# Altium PCB smartBattery.PcbDoc
Units mil, origin at the board's own origin, x right, y up, seen from the top; angles counter-clockwise.
Board outline 3495 x 2505 mil, 2 copper layers (Top Layer, Bottom Layer); 18 components, 17 nets, 60 pads, 2 vias.
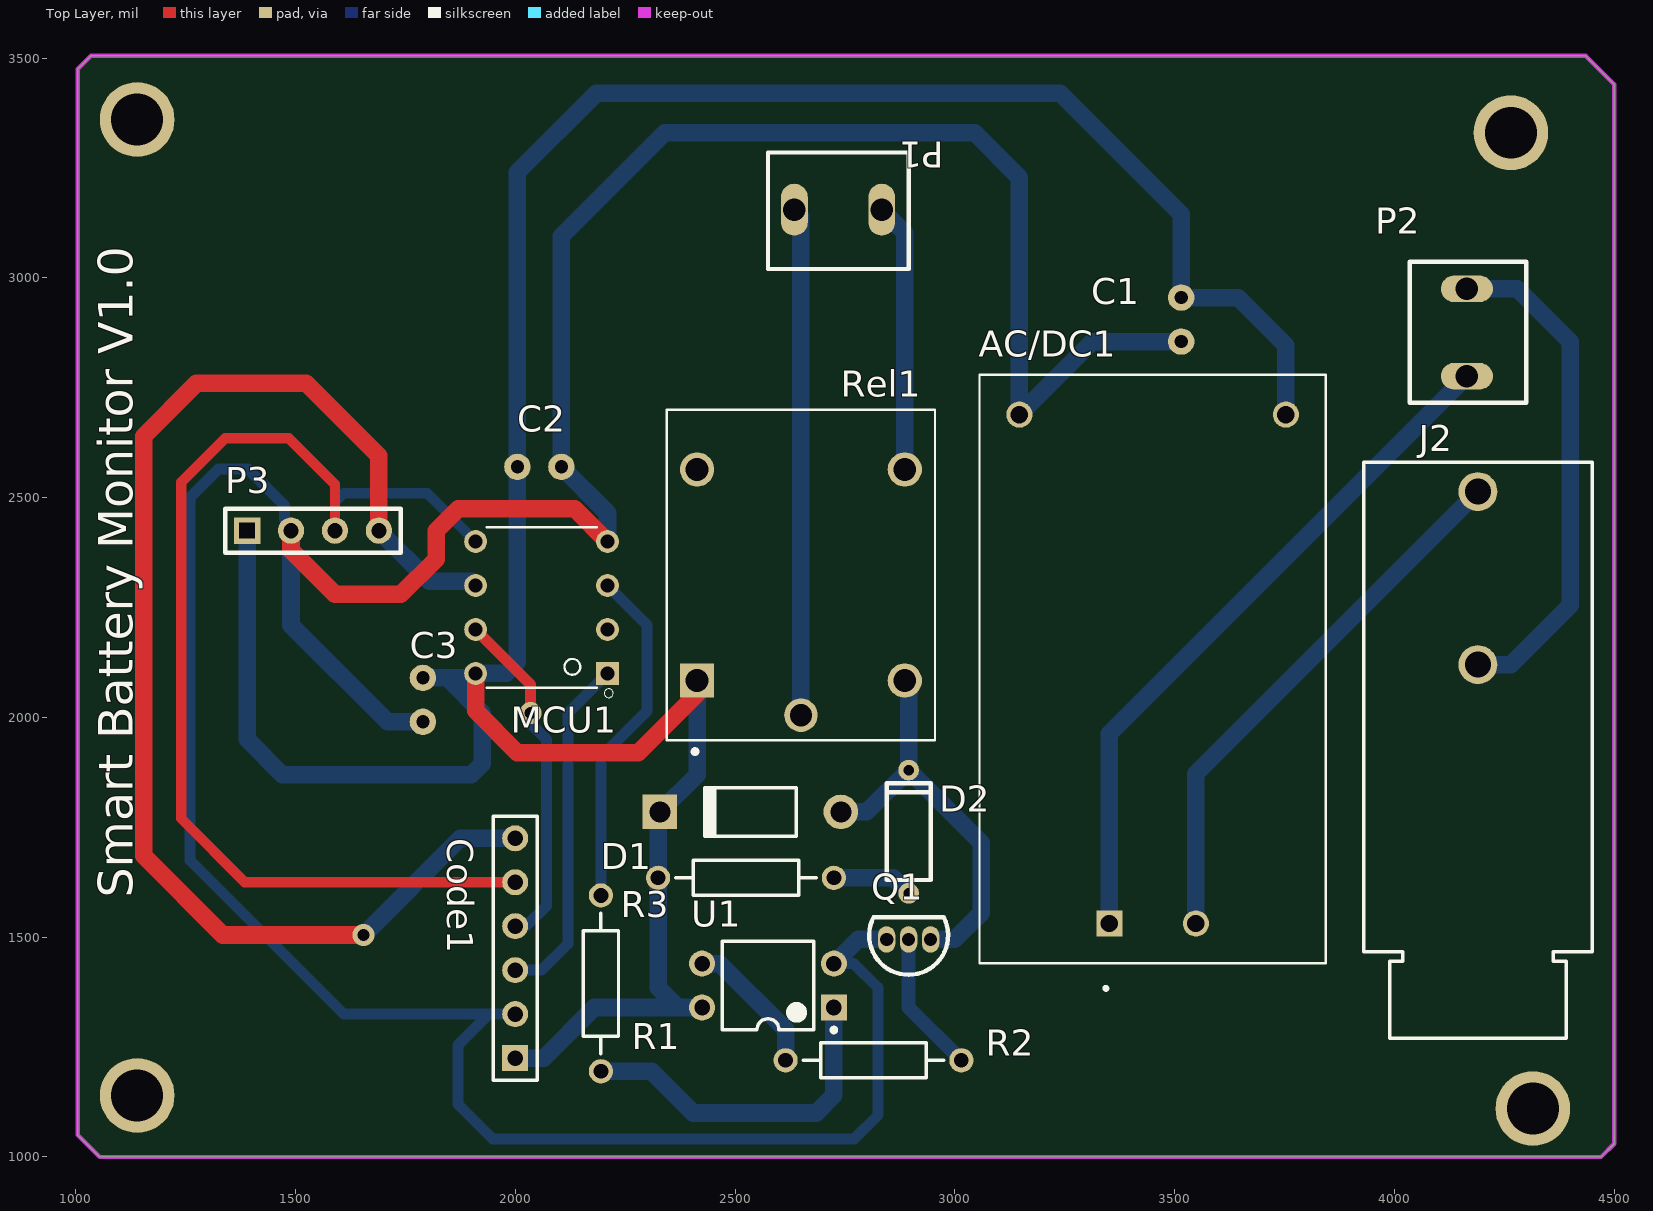
[diagram p0: Top Layer view]
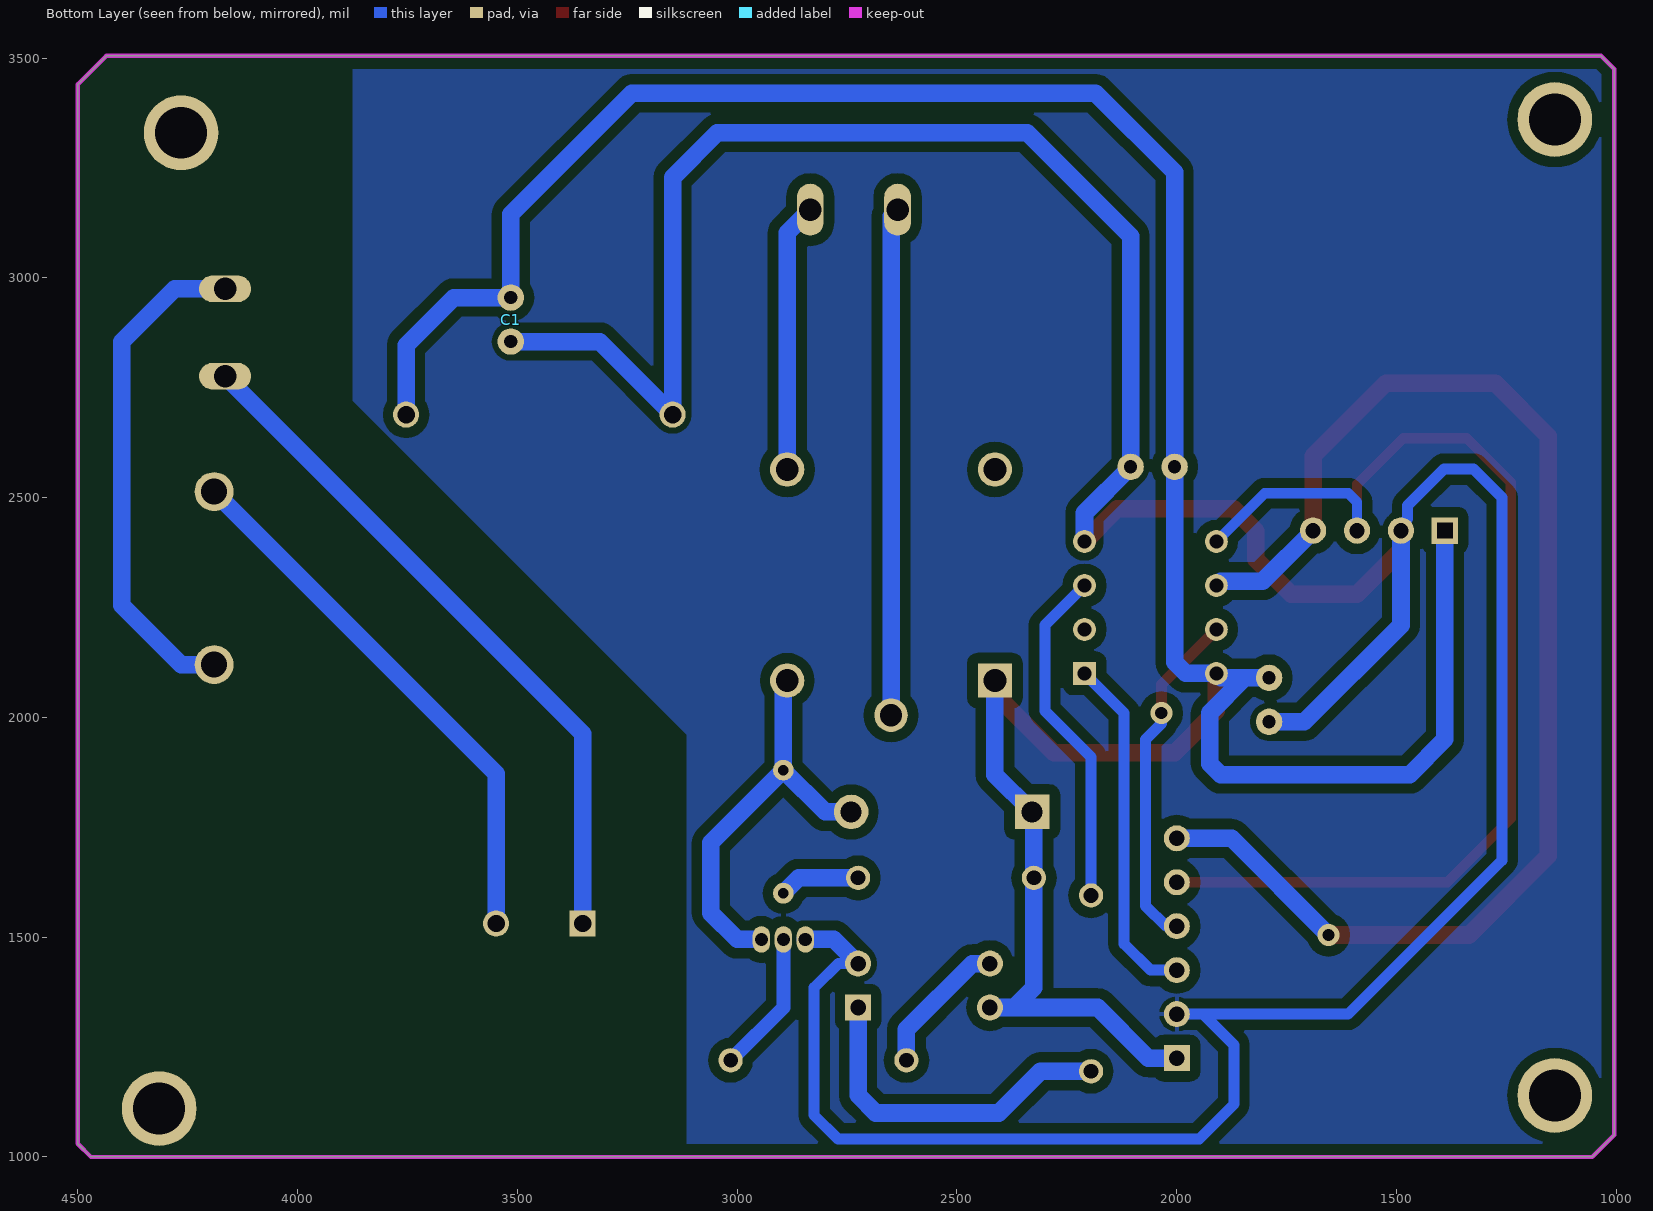
[diagram p1: Bottom Layer view, seen from below]

## Layer stack, top to bottom
Top Solder: solder mask 0.4, Solder Resist, Dk 3.5
Top Layer: signal copper 1.4
Dielectric 1: dielectric 12.6, FR-4, Dk 4.8
Bottom Layer: signal copper 1.4
Bottom Solder: solder mask 0.4, Solder Resist, Dk 3.5

## Board outline
1005,1050 1005,3475 1035,3505 4435,3505 4500,3440 4500,1030 4470,1000 1055,1000

## Design rules (kind name [scope] priority, off if disabled: settings)
Clearance [All] p1: gap=23.62 ignorepadtopadclearanceinfootprint=FALSE
PolygonConnect [All] p1: connectstyle=Relief reliefconductorwidth=10 reliefentries=4 polygonreliefangle="90 Angle" airgapwidth=10
RoutingVias [All] p1: holewidth=28 width=50 viastyle="Through Hole" minholewidth=28 minwidth=50 maxholewidth=28 maxwidth=50
SolderMaskExpansion [All] p1: expansion=4
Width [All] p1: maxlimit=50 minlimit=23.62 preferedwidth=31.5
30 further rules are at their usual default settings.

## Components (designator, comment, footprint, x,y, rotation, side; value= is the part's Value field where it differs from the comment)
AC/DC1 "HLK-PM03" CONV_HLK-PM03 3450,2110 r90 top
C1 "10 uF" AluminumCap 3515,2905 r270 bottom (schematic designator c1)
C2 "0.1uF" ceramicCapTHT 2055,2570 r180 top
C3 "0.1uF" ceramicCapTHT 1790,2040 r90 top
Code1 "" HDR1X6 2000,1225 r90 top
D1 "Diode 1N4001" DO-41 2535,1785 r180 top
D2 "LED" SDO27 2895,1600 r90 top
J2 "Fuse" 696310001002 4190,2316.85 r90 top
MCU1 "ATTINY85-20PU" DIP762W46P254L927H533Q8B 2060,2250 r180 top
P1 "Charger_Socket" TB_2Pin 2635,3155 r0 top
P2 "AC_In" TB_2Pin 4165,2776.18 r90 top
P3 "Bluetooth" pinhead_01x04 1390,2425 r0 top
Q1 "BC337-25RL1G" TO-92 2945,1495 r180 top
R1 "Res2" AXIAL-0.4 2195,1395 r270 top value=470
R2 "Res2" AXIAL-0.4 2815,1220 r180 top value=470
R3 "Res2" AXIAL-0.4 2525,1635 r180 top value=220
Rel1 "Relay 5VDC" RELAY_SRD-05VDC-SL-C 2650,2323.9 r90 top
U1 "PC817" DIP-4 2575,1390 r180 top

## Footprints (in the part's own frame and the unit in brackets; to place one, negate y for a bottom-side part, rotate by r counter-clockwise, add the part's x,y. Pads: shape width x height; smd on the part's side, far side on the other; paste and mask are expansions set on the pad)
696310001002 [mm]
  round 2.25 hole 1.5: 1(-5,0) 2(5,0)
  silkscreen extent -26.6,-6.6 6.7,6.6
AluminumCap [mil]
  round 60 hole 30: 1(-50,0) 2(50,0)
  body extent -108,-108 108,108, height 512
AXIAL-0.4 [mm] "Axial Device, Thru-Hole; 2 Leads; 0.4 in Pin Spacing"
  round 1.4 hole 0.85: 1(-5.08,0) 2(5.08,0)
  silkscreen extent -4.06,-1.02 4.06,1.02
ceramicCapTHT [mil]
  round 60 hole 30: 1(-50,0) 2(50,0)
  body extent -79,-49 79,49, height 217
CONV_HLK-PM03 [mm]
  rect 1.508x1.508 hole 1: 1(-14.7,2.5)
  round 1.508 hole 1: 2(-14.7,-2.5) 3(14.7,7.7) 4(14.7,-7.7)
  silkscreen extent -18.55,-10 17,10
DIP762W46P254L927H533Q8B [mil]
  rect 52x52 hole 32: 1(-150,150)
  round 52 hole 32: 2(-150,50) 3(-150,-50) 4(-150,-150) 5(150,-150) 6(150,-50) 7(150,50) 8(150,150)
  silkscreen extent -163,-182 125,205, body extent -155,-183 155,183, height 98
DIP-4 [mm] "DIP; 4 Leads; Row Spacing 7.62 mm; Pitch 2.54 mm"
  rect 1.5x1.5 hole 0.9: 1(-3.81,1.27)
  round 1.5 hole 0.9: 2(-3.81,-1.27) 3(3.81,-1.27) 4(3.81,1.27)
  silkscreen extent -3.94,-2.55 2.65,2.69, body extent -3.15,-2.5 3.15,2.5, height 5.6
DO-41 [mm] "Diode, Axial; Body 5.2 x 2.7 mm (LxDia. max), Lead Dia. 0.86 mm (max)"
  round 2 hole 1.2: 1(-5.23,0)
  rect 2x2 hole 1.2: 2(5.23,0)
  silkscreen extent -2.65,-1.4 2.75,1.4
HDR1X6 [mm] "Connector; Header; 6 Position"
  rect 1.5x1.5 hole 0.9: 1(0,0)
  round 1.5 hole 0.9: 2(2.54,0) 3(5.08,0) 4(7.62,0) 5(10.16,0) 6(12.7,0)
  silkscreen extent -1.27,-1.27 13.97,1.27
pinhead_01x04 [mil]
  rect 60x60 hole 35 square: 1(0,0)
  round 60 hole 35: 2(100,0) 3(200,0) 4(300,0)
  silkscreen extent -50,-50 350,50, body extent -60,-50 360,50, height 335
RELAY_SRD-05VDC-SL-C [mm]
  rect 1.98x1.98 hole 1.32: A1(-6.1,6)
  round 1.98 hole 1.32: A2(-6.1,-6) NC(6.1,6) NO(6.1,-6)
  round 1.935 hole 1.29: COM(-8.1,0)
  silkscreen extent -10.3,-7.75 9.55,7.75
SDO27 [mm]
  round 1.2 hole 0.6: 1(0,0) 2(7.112,0)
  silkscreen extent 0.76,-1.27 6.35,1.27, body extent -0.19,-1.02 7.31,0.98, height 2
TB_2Pin [mm]
  oval 1.55x3 hole 1.3: 1(0,0) 2(5.05,0)
  silkscreen extent -1.52,-3.43 6.6,3.3, body extent -2.54,-4.95 7.46,5.55, height 14
TO-92 [mil] "TO-92"
  oval 39.37x60 hole 30: 1(0,0) 2(50,0) 3(100,0)
  silkscreen extent -40,-50 140,81, body extent -44,-60 144,94, height 217

## Part data
AC/DC1: "AC DC 3W power module", Package=Package, Availability=Unavailable, MF=Hi-link, MP=HLK-PM03, Price=None, SnapEDA_Link=https://www.snapeda.com/parts/HLK-PM03/Hi-link/view-part/3215695/?ref=snap
C1: library part AluminumCap, "Cap Aluminum 10uF 400V 20% (10 X 16mm) Radial 5mm 150mA 8000 hr 105C Bulk", Case Size/Dimension="10 x 16 mm", Manufacturer 1=Nichicon, Manufacturer Part Number 1=UCY2G100MPD, Operating Temp-Max="105 C", Rated Voltage="400 V", Supplier Part Number 1=493-13387-ND, Capacitance="10 uF", ComponentLink1Description=http://www.nichicon.co.jp/english/products/pdfs/e-cy.pdf?src-supplier=Avnet, ComponentLink1URL=http://www.nichicon.co.jp/english/products/pdfs/e-cy.pdf?src-supplier=Avnet, ComponentLink2Description=https://www.verical.com/server-webapp/html/getDatasheet?partID=464569&src-supplier=Verical, ComponentLink2URL=https://www.verical.com/server-webapp/html/getDatasheet?partID=464569&src-supplier=Verical, ComponentLink3Description=http://www.farnell.com/datasheets/51405.pdf?src-supplier=Element14, ComponentLink3URL=http://www.farnell.com/datasheets/51405.pdf?src-supplier=Element14, ComponentLink4Description=http://www.farnell.com/datasheets/1914577.pdf?src-supplier=Element14, ComponentLink4URL=http://www.farnell.com/datasheets/1914577.pdf?src-supplier=Element14, ComponentLink5Description=http://www.nichicon.co.jp/english/products/pdfs/e-cy.pdf?src-supplier=Avnet+Europe, ComponentLink5URL=http://www.nichicon.co.jp/english/products/pdfs/e-cy.pdf?src-supplier=Avnet+Europe, Description 1="Cap Aluminum 10uF 400V 20% (10 X 16mm) Radial 5mm 150mA 8000 hr 105C Bulk", Pricing 1="1=0.82, 10=0.622, 50=0.5164, 100=0.4447, 500=0.3443, 1000=0.2965, 2500=0.2773, 5000=0.263 (USD)", Stock 1=39516, Supplier 1=Digi-Key, Type=Radial
C2 C3: library part ceramicCapTHT, "22pF 50 V dc Ceramic Single Layer Capacitor; Y5R Dielectric THT F Series", Capacitance Tolerance="± 10%", Capacitor Terminals="Radial Leaded", Dielectric Characteristic=Y5R, Manufacturer 1=Vishay, Manufacturer Part Number 1=F222K69Y5RP63K7R, Operating Temperature Max=125°C, Operating Temperature Min=-30°C, Supplier Part Number 1=1241PH-ND, Voltage Rating=2kV, Capacitance=0.1uF, ComponentLink1Description=http://www.vishay.com/docs/28536/geninfo-cd-rfi-safcaps.pdf?src-supplier=Digi-Key, ComponentLink1URL=http://www.vishay.com/docs/28536/geninfo-cd-rfi-safcaps.pdf?src-supplier=Digi-Key, ComponentLink2Description=http://www.vishay.com/docs/28500/hvldf02.pdf?src-supplier=Future+Electronics, ComponentLink2URL=http://www.vishay.com/docs/28500/hvldf02.pdf?src-supplier=Future+Electronics, ComponentLink3Description=http://uk.rs-online.com/webdocs/0d81/0900766b80d81bfa.pdf?src-supplier=RSComponents, ComponentLink3URL=http://uk.rs-online.com/webdocs/0d81/0900766b80d81bfa.pdf?src-supplier=RSComponents, ComponentLink4Description=http://datasheet.octopart.com/F222K69Y5RP63K7R-Vishay-datasheet-13535054.pdf?src-supplier=Newark, ComponentLink4URL=http://datasheet.octopart.com/F222K69Y5RP63K7R-Vishay-datasheet-13535054.pdf?src-supplier=Newark, ComponentLink5Description=http://datasheet.octopart.com/F222K69Y5RP63K7R-Vishay-datasheet-62318010.pdf?src-supplier=Element14, ComponentLink5URL=http://datasheet.octopart.com/F222K69Y5RP63K7R-Vishay-datasheet-62318010.pdf?src-supplier=Element14, ComponentLink6Description=http://datasheet.octopart.com/F222K69Y5RP63K7R-Vishay-datasheet-68391036.pdf?src-supplier=Newark, ComponentLink6URL=http://datasheet.octopart.com/F222K69Y5RP63K7R-Vishay-datasheet-68391036.pdf?src-supplier=Newark, ComponentLink7Description=http://datasheet.octopart.com/F222K69Y5RP63K7R-Vishay-datasheet-12512896.pdf?src-supplier=Future+Electronics, ComponentLink7URL=http://datasheet.octopart.com/F222K69Y5RP63K7R-Vishay-datasheet-12512896.pdf?src-supplier=Future+Electronics, ComponentLink8Description=http://datasheet.octopart.com/F222K69Y5RP63K7R-Vishay-datasheet-12545544.pdf?src-supplier=Future+Electronics, ComponentLink8URL=http://datasheet.octopart.com/F222K69Y5RP63K7R-Vishay-datasheet-12545544.pdf?src-supplier=Future+Electronics, ComponentLink9Description=http://datasheet.octopart.com/F222K69Y5RP63K7R-Vishay-datasheet-8817196.pdf?src-supplier=Farnell, ComponentLink9URL=http://datasheet.octopart.com/F222K69Y5RP63K7R-Vishay-datasheet-8817196.pdf?src-supplier=Farnell, ComponentLink10Description=http://datasheet.octopart.com/F222K69Y5RP63K7R-Vishay-datasheet-531293.pdf?src-supplier=Farnell, ComponentLink10URL=http://datasheet.octopart.com/F222K69Y5RP63K7R-Vishay-datasheet-531293.pdf?src-supplier=Farnell, ComponentLink11Description=http://datasheet.octopart.com/F222K69Y5RP63K7R-Vishay-Dale-datasheet-62311638.pdf?src-supplier=Allied+Electronics, ComponentLink11URL=http://datasheet.octopart.com/F222K69Y5RP63K7R-Vishay-Dale-datasheet-62311638.pdf?src-supplier=Allied+Electronics, Description 1="2.2nF 2000 V dc Ceramic Single Layer Capacitor; Y5R Dielectric THT F Series", Lead Spacing=7.5mm, Packaging=Each, Pricing 1="1=0.85, 10=0.624, 50=0.499, 100=0.4277, 500=0.3386, 1000=0.2851, 2500=0.2673, 5000=0.2495 (USD)", Product Range="F Series", Stock 1=7107, Supplier 1=Digi-Key, SVHC="No SVHC (17-Dec-2014)"
Code1: library part "Header 6", "Header, 6-Pin", LatestRevisionDate=17-Jul-2002, LatestRevisionNote="Re-released for DXP Platform.", Publisher="Altium Limited"
D1: "1 Amp General Purpose Rectifier", Code_JEDEC=DO-204-AL, ComponentLink1Description="Manufacturer Link", ComponentLink1URL=http://www.fairchildsemi.com/, ComponentLink2Description=Datasheet, ComponentLink2URL=http://www.fairchildsemi.com/ds/1N%2F1N4001.pdf, DatasheetVersion=1998, LatestRevisionDate=17-Jul-2002, LatestRevisionNote="Re-released for DXP Platform.", PackageDescription="Diode, Axial; Body 5.2 x 2.7 mm (LxDia. max), Lead Dia. 0.86 mm (max)", PackageReference=DO-41, PackageVersion=Aug-1999, Published=8-Jun-2000, Publisher="Altium Limited"
D2: library part 1N4148, "NTE ELECTRONICS - 1N4148 - Small Signal Diode, Switching, Single, 75 V, 300 mA, 1 V, 4 ns, 1 A", Diode Case Style=DO-204AH, Forward Current If(AV)=300mA, Forward Surge Current Ifsm Max=1A, Forward Voltage VF Max=1V, Manufacturer 1="NTE Electronics", Operating Temperature Max=175°C, Repetitive Reverse Voltage Vrrm Max=75V, Supplier Part Number 1=2368-1N4148-ND, Automotive Qualification Standard=-, ComponentLink1Description=http://www.farnell.com/datasheets/158116.pdf?src-supplier=Element14, ComponentLink1URL=http://www.farnell.com/datasheets/158116.pdf?src-supplier=Element14, Description 1="NTE ELECTRONICS - 1N4148 - Small Signal Diode, Switching, Single, 75 V, 300 mA, 1 V, 4 ns, 1 A", Diode Configuration=Single, Manufacturer Part Number 1=1N4148, No. of Pins=2Pins, Packaging=Each, Pricing 1="25=0.05 (USD)", Product Range="1N4148 Series", Reverse Recovery Time trr Max=4ns, Stock 1=0, Supplier 1=Digi-Key
J2: library part 696310001002, "Fuse Holder 20A 250V 1 Circuit Cartridge Through Hole", Package=None, Availability=Warning, Check_prices=https://www.snapeda.com/parts/696310001002/Wurth%20Electronics%20Inc./view-part/1196556/?ref=eda, MF="Wurth Electronics", MP=696310001002, Price=None, Purchase-URL=https://pricing.snapeda.com/search/part/696310001002/?ref=eda, SnapEDA_Link=https://www.snapeda.com/parts/696310001002/Wurth%20Electronics%20Inc./view-part/1196556/?ref=snap
MCU1: "AVR AVRA® ATtiny, Functional Safety (FuSa) Microcontroller IC 8-Bit 20MHz 8KB (4K x 16) FLASH 8-PDIP", Package="DIP-8 Atmel", Availability=Good, Check_prices=https://www.snapeda.com/parts/ATTINY85-20PU/Microchip/view-part/42827/?ref=eda, MF=Microchip, MP=ATTINY85-20PU, Price=None, Purchase-URL=https://pricing.snapeda.com/search/part/ATTINY85-20PU/?ref=eda, SnapEDA_Link=https://www.snapeda.com/parts/ATTINY85-20PU/Microchip/view-part/42827/?ref=snap
P1 P2: library part OSTVN02A150, "TERM BLK 2P SIDE ENT 2.54MM PCB", Color=Green, Current=6A, Manufacturer 1=On-Shore-Technology-Inc., Operating Temperature="-30°C ~ 105°C", Supplier Part Number 1=ED10561-ND, Voltage=125V, Category="Connectors, Interconnects", Clamp Material - Plating=Brass, ComponentLink1Description=http://www.on-shore.com/wp-content/uploads/2015/09/ostvnxxa150.pdf?src-supplier=Digi-Key, ComponentLink1URL=http://www.on-shore.com/wp-content/uploads/2015/09/ostvnxxa150.pdf?src-supplier=Digi-Key, Contact Material - Plating=Brass, Description 1="TERM BLK 2P SIDE ENT 2.54MM PCB", Family="Terminal Blocks - Wire to Board", Features=-, Housing Material=Thermoplastic, Manufacturer Part Number 1=OSTVN02A150, Mating Orientation="Horizontal with Board", Mounting Type="Through Hole", Number of Levels=1, Packaging=Bulk, Pitch="0.100\" (2.54mm)", Positions Per Level=2, Pricing 1="1=0.91, 10=0.568, 25=0.486, 50=0.4368, 100=0.4277, 250=0.364, 500=0.3458, 1000=0.3094, 5000=0.2421 (USD)", Screw Material - Plating="Steel - Zinc Plated", Screw Thread=M1.6, Series=OSTVN, Stock 1=4786, Supplier 1=Digi-Key, Torque - Screw="0.15 Nm (1.3 Lb-In)", Wire Gauge="20-30 AWG", Wire Termination="Screw - Rising Cage Clamp"
P3: library part pinheadF_01x04, "pin header 01x04 straight"
Q1: "Trans Gp Bjt NPN 45V 0.8A 625MW 3-PIN TO-92 T/r", Collector- Base Voltage VCBO="50 V", Collector-Emitter Saturation Voltage="0.7 V", Collector- Emitter Voltage VCEO Max="45 V", Emitter- Base Voltage VEBO="5 V", Manufacturer 1="ON Semiconductor", Maximum DC Collector Current="0.8 A", Maximum Operating Temperature="+ 150 C", Maximum Power Dissipation="625 mW", Minimum Operating Temperature="- 55 C", Package / Case="TO-92-3 (TO-226)", Supplier Part Number 1=BC337-25RL1GOSDKR-ND, <PCN>=http://www.mouser.com/PCN/ON_Semiconductor_20685.pdf, Brand="ON Semiconductor", ComponentLink1Description=http://www.onsemi.com/pub/Collateral/BC337-D.PDF?src-supplier=Digi-Key, ComponentLink1URL=http://www.onsemi.com/pub/Collateral/BC337-D.PDF?src-supplier=Digi-Key, ComponentLink2Description=http://www.onsemi.com/pub_link/Collateral/BC337-D.PDF?src-supplier=Avnet, ComponentLink2URL=http://www.onsemi.com/pub_link/Collateral/BC337-D.PDF?src-supplier=Avnet, ComponentLink3Description=https://www.verical.com/server-webapp/html/getDatasheet?partID=53827&src-supplier=Verical, ComponentLink3URL=https://www.verical.com/server-webapp/html/getDatasheet?partID=53827&src-supplier=Verical, ComponentLink4Description=http://www.farnell.com/datasheets/1789499.pdf?src-supplier=Element14, ComponentLink4URL=http://www.farnell.com/datasheets/1789499.pdf?src-supplier=Element14, Configuration=Single, DC Collector/Base Gain hfe Min=160, Description 1="Trans Gp Bjt NPN 45V 0.8A 625MW 3-PIN TO-92 T/r", Factory Pack Quantity=2000, Gain Bandwidth Product fT="210 MHz", Manufacturer Part Number 1=BC337-25RL1G, Mounting Style="Through Hole", Packaging=Reel, Product Category="Bipolar Transistors - BJT", RoHS=Details, Series=BC337-25, Stock 1=0, Supplier 1=Digi-Key, Transistor Polarity=NPN
R1 R2 R3: "Resistor", LatestRevisionDate=17-Jul-2002, LatestRevisionNote="Re-released for DXP Platform.", PackageDescription="Axial Device, Thru-Hole; 2 Leads; 0.4 in Pin Spacing", PackageReference=AXIAL-0.4, Published=8-Jun-2000, Publisher="Altium Limited"
Rel1: library part SRD-05VDC-SL-C, "5V Trigger Relay Module For Arduino And Raspberry Pi 5V Trigger Relay Module For Arduino And Raspberry Pi", Package=None, Availability=Unavailable, MF="Songle Relay", MP=SRD-05VDC-SL-C, Price=None, SnapEDA_Link=https://www.snapeda.com/parts/SRD-05VDC-SL-C/Songle%20Relay/view-part/1029484/?ref=snap
U1: library part Optoisolator1, "4-Pin Phototransistor Optocoupler", DatasheetVersion=Nov-2003, LatestRevisionDate=04-Mar-2005, LatestRevisionNote="Sch pins 3 & 4 Swapped.", PackageReference=DIP-4, Published=24-Mar-1999, Publisher="Altium Limited"

## Free pads (board coordinates)
  round 170 hole 118: 2(4265,3330) 3(1140,3360) 4(1140,1140) 5(4315,1110)

## Via types
v1: diameter 50, hole 28, Top Layer to Bottom Layer, 2 vias

## Nets (pads, with @x,y where several pads share a name; then routed paths per layer and width w, separated by ;. In a path a pad name is that pad's centre, name@x,y a point inside that pad or via, vN(x,y) a via of type N, cw(c..) or ccw(c..) an arc to the next point about the centre after c; other vN are vias at no path point)
"control signal": MCU1.3 R1.1 | length 785.8
  Bottom Layer w25: R1.1 2195,1910 2300,2015 2300,2210 MCU1.3
GND: AC/DC1.3 C1.2 C2.1 C3.1 Code1.2 MCU1.4 P3.2 Q1.3 U1.2 | length 8307.8
  Top Layer w40: P3.2 1490,2380 1590,2280 1740,2280 1820,2360 1820,2425 1870,2475 2135,2475 MCU1.4
  Bottom Layer w25: P3.2 1490,2436.08 1475,2451.08 1475,2481.94 1391.94,2565 1325,2565 1260,2500 1260,1675 1610,1325 1940,1325 ; Code1.2 1940,1325 ; U1.2 2770,1440 2825,1385 2825,1095 2771.12,1041.12 1948.88,1041.12 1870,1120 1870,1255 1940,1325
  Bottom Layer w40: P3.2 1490,2210 1710,1990 C3.1 ; MCU1.4 2210,2465 C2.1 2105,3095 2340,3330 3045,3330 3146.85,3228.15 AC/DC1.3 3313.11,2855 C1.2 ; U1.2 2780,1495 Q1.3
NetAC/DC1_1: AC/DC1.1 P2.1 | length 1581.9
  Bottom Layer w40: AC/DC1.1 3351.57,1962.76 P2.1
NetAC/DC1_2: AC/DC1.2 J2.2 | length 1248.2
  Bottom Layer w40: AC/DC1.2 3548.43,1872.13 J2.2
NetCode1_3: Code1.3 MCU1.1 | length 797.1
  Bottom Layer w25: Code1.3 2060,1425 2120,1485 2120,2010 MCU1.1
NetCode1_4: Code1.4 MCU1.7 | length 786.1
  Top Layer w25: MCU1.7 2035,2075 v1(2035,2010)
  Bottom Layer w25: Code1.4 2025,1525 2071.38,1571.38 2071.38,1950 2035,1986.38 v1(2035,2010)
NetD1_1: D1.1 D2.2 Q1.1 Rel1.A2 | length 934
  Bottom Layer w40: D1.1 2800,1785 D2.2 ; Rel1.A2 2895,2074.96 D2.2 ; Q1.1 3000,1495 3060,1555 3060,1715 D2.2
NetD2_1: D2.1 R3.1 | length 184.5
  Bottom Layer w40: R3.1 2860,1635 D2.1
NetJ2_1: J2.1 P2.2 | length 1150.6
  Bottom Layer w40: P2.2 4280,2975 4400,2855 4400,2255 4265,2120 J2.1
NetP1_1: P1.1 Rel1.COM | length 1156.2
  Bottom Layer w40: P1.1 2650,3140 Rel1.COM
NetP1_2: P1.2 Rel1.NO | length 612.6
  Bottom Layer w40: P1.2 2886.22,3102.6 Rel1.NO
NetQ1_2: Q1.2 R2.1 | length 324.7
  Bottom Layer w32: Q1.2 2895,1340 R2.1
NetR1_2: R1.2 U1.1 | length 785.9
  Bottom Layer w40: R1.2 2310,1195 2405,1100 2685,1100 2725,1140 U1.1
NetR2_2: R2.2 U1.3 | length 322.1
  Bottom Layer w40: U1.3 2465,1440 2615,1290 R2.2
RX: Code1.6 MCU1.6 P3.4 | length 3060.5
  Top Layer w40: v1(1655,1505) 1335,1505 1155,1685 1155,2640 1275,2760 1525,2760 1690,2595 P3.4
  Bottom Layer w40: v1(1655,1505) 1875,1725 Code1.6 ; P3.4 1805,2310 1900,2310 MCU1.6
TX: Code1.5 MCU1.5 P3.3 | length 2563.8
  Top Layer w23.62: P3.3 1590,2530 1485,2635 1340,2635 1240,2535 1240,1770 1385,1625 Code1.5
  Bottom Layer w23.62: P3.3 1590,2490 1610,2510 1800,2510 MCU1.5
VCC: AC/DC1.4 C1.1 C2.2 C3.2 Code1.1 D1.2 MCU1.8 P3.1 R3.2 Rel1.A1 U1.4 | length 6940.9
  Top Layer w40: MCU1.8 1910,2015 2005,1920 2280,1920 2413.78,2053.78 Rel1.A1
  Bottom Layer w40: P3.1 1390,1950 1470,1870 1900,1870 1925,1895 1925,2010 1845,2090 ; C3.2 1845,2090 ; Code1.1 2065,1225 2180,1340 2370,1340 ; Rel1.A1 2413.78,1869.69 D1.2 2325,1780.91 R3.2 2325,1385 2370,1340 ; U1.4 2370,1340 ; AC/DC1.4 3753.15,2846.85 3645,2955 C1.1 3515,3145 3240,3420 2185,3420 2005,3240 C2.2 2005,2125 1980,2100 MCU1.8 1900,2090 1845,2090
pads on no net: MCU1.2 Rel1.NC

## Polygon pours and split planes (outlines as drawn)
GND on Bottom Layer "Mechanical 1-No Net" (solid, pour order 2): 1020,3480 1025,3475 3875,3475 3875,2720 3115,1960 3115,1030 1045,1030 1020,1055

## Keep-outs
Keep-Out Layer:
  the board outline again, w10

## Silkscreen, mask and mechanical layers (free items; w line width, h text height)
Top Overlay:
  text "Smart Battery Monitor V1.0" at 1130,1590 h78.74 r90